# Altium PCB lab2_shkabara_boost.PcbDoc
Units mm, origin at the board's own origin, x right, y up, seen from the top; angles counter-clockwise.
Board outline 60.7 x 40 mm, 2 copper layers (Top Layer, Bottom Layer), stack 1.57 mm thick; 26 components, 13 nets, 74 pads, 197 vias.
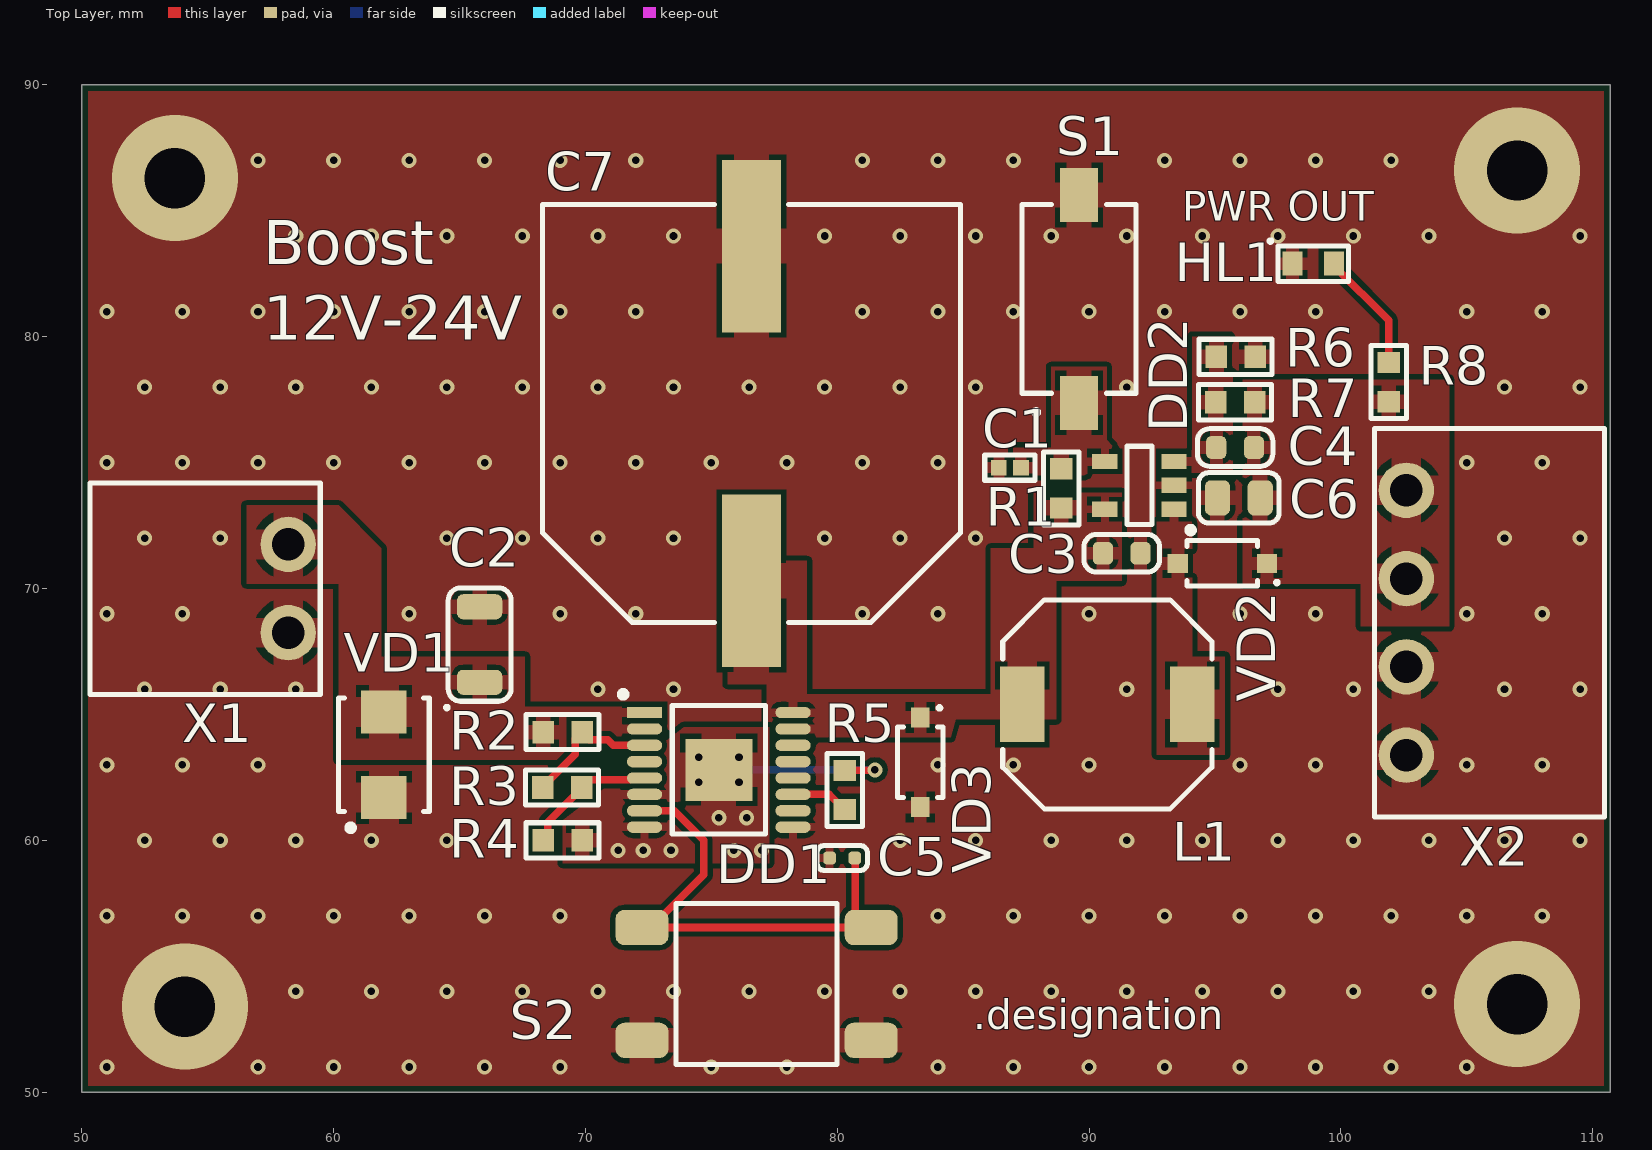
[diagram p0: Top Layer view]
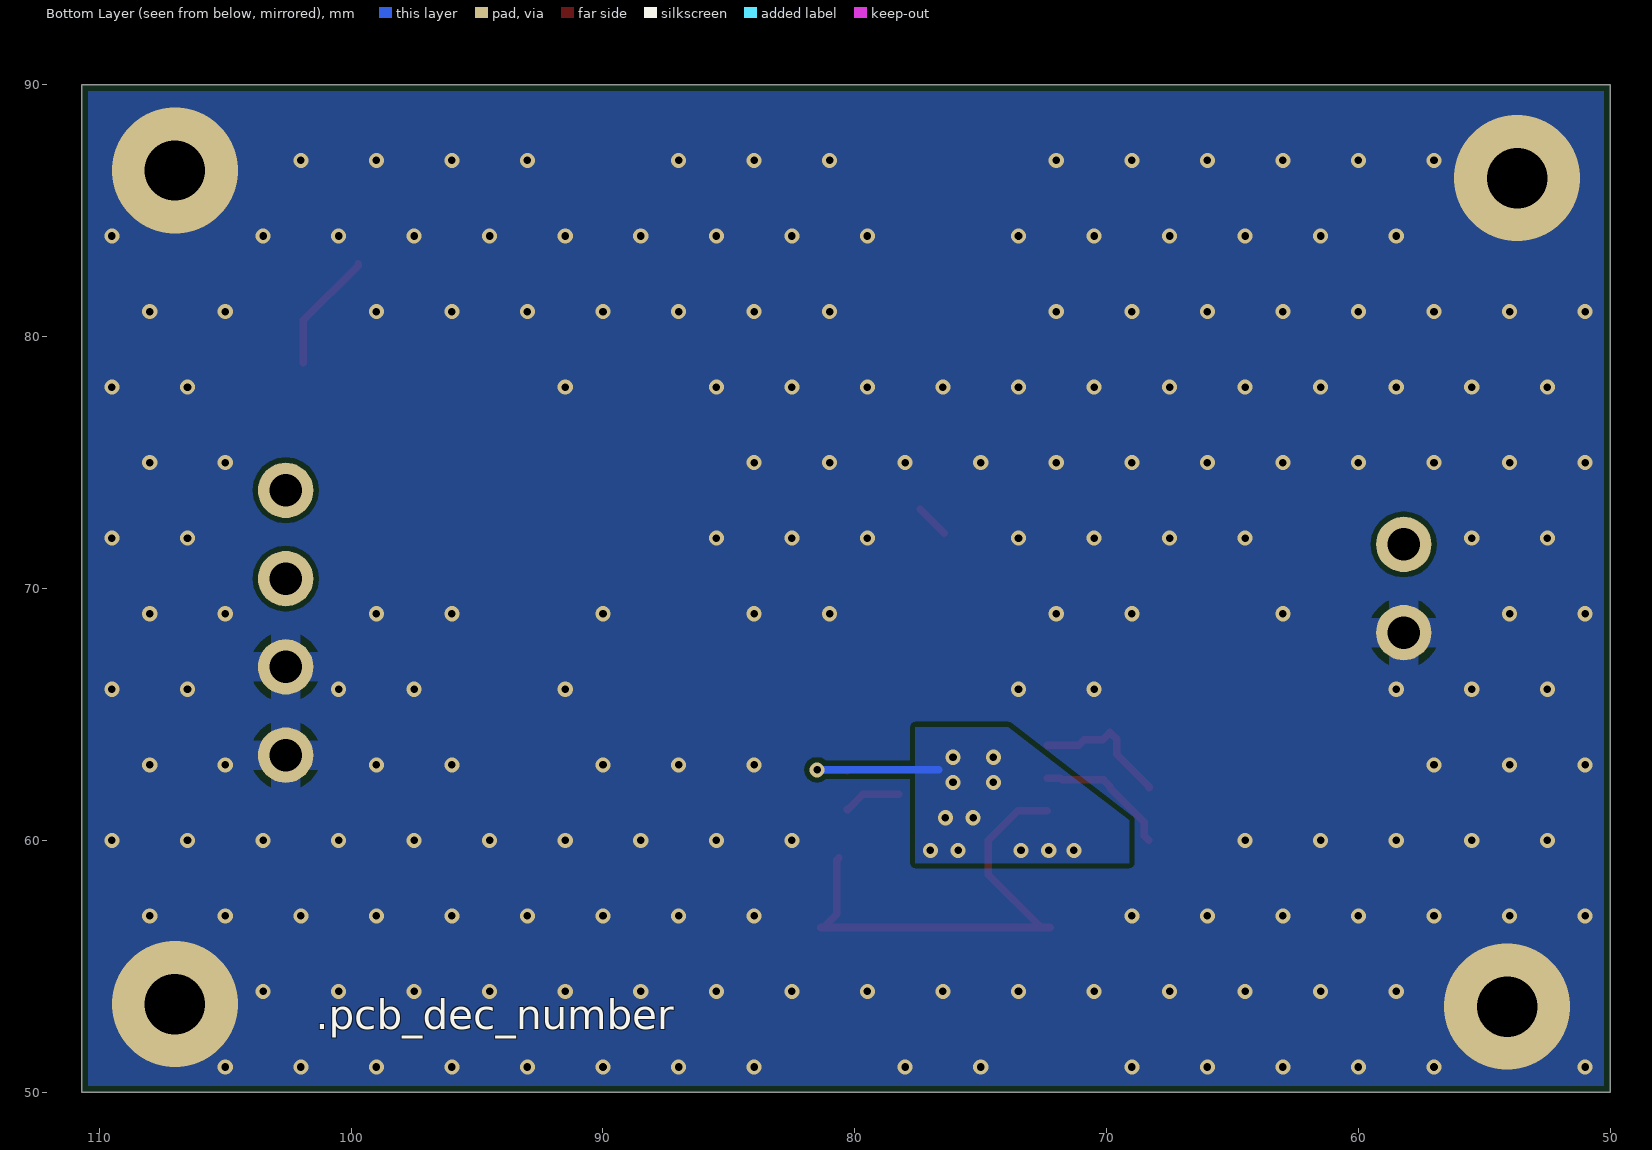
[diagram p1: Bottom Layer view, seen from below]

## Layer stack, top to bottom
Top Solder: solder mask 0.0102, Solder Resist, Dk 3.5
Top Layer: signal copper 0.035
Core 1: core 1.5, FR4, Dk 4.6
Bottom Layer: signal copper 0.035
Bottom Solder: solder mask 0.0102, Solder Resist, Dk 3.5

## Board outline
50,50 110.7,50 110.7,90 50,90

## Design rules (kind name [scope] priority, off if disabled: settings)
AcuteAngle min_acute_angle [OnCopper] p1: minimum=3.50000000000000E+0001 checktracksonly=FALSE // Минимальный угол между примитивами топологии
BoardOutlineClearance board_outline_clearance_std [NOT (OnLayer('Bottom Overlay') OR OnLayer('Top Overlay'))] p1: gap=0.25 ignorepadtopadclearanceinfootprint=FALSE except(0: Arc-SplitContinuation Track-SplitContinuation SMDPad-SplitContinuation THPad-SplitContinuation Via-SplitContinuation Fill-SplitContinuation Poly-SplitContinuation Region-SplitContinuation Text-SplitContinuation) // Отступ элементов топологии от края фрезеруемой печатной платы
Clearance clearance_outer_35um_std [OnTopLayer OR OnBottomLayer] p1: gap=0.2 ignorepadtopadclearanceinfootprint=TRUE except(0.25: Arc-Hole Track-Hole SMDPad-Hole THPad-Hole Via-Hole Fill-Hole Poly-Hole Region-Hole Text-Hole) // Зазоры на внешних слоях
Clearance clearance_inner_35um_std [NOT (OnTopLayer Or OnBottomLayer)] p2: gap=0.2 ignorepadtopadclearanceinfootprint=FALSE except(0.25: Arc-Hole Track-Hole SMDPad-Hole THPad-Hole Via-Hole Fill-Hole Poly-Hole Region-Hole Text-Hole) // Зазоры на внутренних слоях
ComponentClearance [All] p1: gap=0 collisioncheckmode=3 verticalgap=0 showdistances=FALSE
DiffPairsRouting diff_pairs_routing [All] p1: maxlimit=0.127 minlimit=0.127 mostfreqgap=0.127 toplayer_minwidth=0.143 toplayer_maxwidth=0.143 toplayer_prefwidth=0.143 bottomlayer_minwidth=0.143 bottomlayer_maxwidth=0.143 bottomlayer_prefwidth=0.143 impedanceprofiledriven=TRUE impedanceprofileid={FD46899E-B5A2-4EF5-A302-5D2DB6A51F35} maxuncoupledlength=12.7 // Правила трассировки дифференциальных пар
HoleSize min_hole_size_std [IsPad] p1: absolutevalues=TRUE maxlimit=5.9 minlimit=0.6 maxpercent=80.000 minpercent=20.000 // Диаметр межслойного переходного отверстия
HoleSize min_hole_size_via_std [IsVia] p2: absolutevalues=TRUE maxlimit=5.9 minlimit=0.3 maxpercent=80.000 minpercent=20.000 // Минимальный диаметр монтажного отверстия
HoleToHoleClearance hole_to_hole_clearance_std [All] p1: gap=0.2 allowstackedmicrovias=FALSE // Минимальное расстояние между краями двух отверстий
MinimumAnnularRing min_via_ar_std [All] p1: minimumring=0.15 // Поясок площадки переходного отверстия (Annular ring VIA)
MinimumAnnularRing min_pad_ar_std [All] p2: minimumring=0.2 // Поясок монтажной контактной площадки (Annular ring PAD)
MinimumSolderMaskSliver min_solder_mask_bridge_std [All] p1: minsoldermaskwidth=0.15 // Мнимальная ширина масочного мостика
PlaneClearance plane_clearance_35um_std [All] p1: clearance=0.2 // Отступ полигона (для слоя plane) от элементов топологии
PlaneConnect [All] p1: planeconnectstyle=Relief reliefexpansion=0.5 reliefentries=4 reliefconductorwidth=0.2 reliefairgap=0.2
PolygonConnect poly_connect_to_pad<=0.3 [(AsMM(PadXSize_AllLayers)<=0.301) or (AsMM(PadYSize_AllLayers)<=0.301)] p1: thpad.connectstyle=Relief thpad.reliefconductorwidth=0.2 thpad.reliefentries=4 thpad.polygonreliefangle="90 Angle" thpad.airgapwidth=0.2 smdpad.connectstyle=Relief smdpad.reliefconductorwidth=0.2 smdpad.reliefentries=4 smdpad.polygonreliefangle="90 Angle" smdpad.airgapwidth=0.2 via.connectstyle=Direct via.reliefconductorwidth=0.254 via.reliefentries=4 via.polygonreliefangle="90 Angle" via.airgapwidth=0.254 // Правила подключения полигонов для падов от 0,3мм и меньше
PolygonConnect poly_connect_to_pad<=0.4 [(AsMM(PadXSize_AllLayers)<=0.401) or (AsMM(PadYSize_AllLayers)<=0.401)] p2: thpad.connectstyle=Relief thpad.reliefconductorwidth=0.26 thpad.reliefentries=4 thpad.polygonreliefangle="90 Angle" thpad.airgapwidth=0.2 smdpad.connectstyle=Relief smdpad.reliefconductorwidth=0.26 smdpad.reliefentries=4 smdpad.polygonreliefangle="90 Angle" smdpad.airgapwidth=0.2 via.connectstyle=Direct via.reliefconductorwidth=0.254 via.reliefentries=4 via.polygonreliefangle="90 Angle" via.airgapwidth=0.254 // Правила подключения полигонов для падов от 0,4 и меньше
PolygonConnect poly_connect_to_pad<=0.6 [(AsMM(PadXSize_AllLayers)<=0.601) or (AsMM(PadYSize_AllLayers)<=0.601)] p3: thpad.connectstyle=Relief thpad.reliefconductorwidth=0.33 thpad.reliefentries=4 thpad.polygonreliefangle="90 Angle" thpad.airgapwidth=0.2 smdpad.connectstyle=Relief smdpad.reliefconductorwidth=0.33 smdpad.reliefentries=4 smdpad.polygonreliefangle="90 Angle" smdpad.airgapwidth=0.2 via.connectstyle=Direct via.reliefconductorwidth=0.254 via.reliefentries=4 via.polygonreliefangle="90 Angle" via.airgapwidth=0.254 // Правила подключения полигонов для падов от 0,6мм и меньше
PolygonConnect poly_connect_to_pad<=0.7 [(AsMM(PadXSize_AllLayers)<=0.701) or (AsMM(PadYSize_AllLayers)<=0.701)] p4: thpad.connectstyle=Relief thpad.reliefconductorwidth=0.46 thpad.reliefentries=4 thpad.polygonreliefangle="90 Angle" thpad.airgapwidth=0.2 smdpad.connectstyle=Relief smdpad.reliefconductorwidth=0.46 smdpad.reliefentries=4 smdpad.polygonreliefangle="90 Angle" smdpad.airgapwidth=0.2 via.connectstyle=Direct via.reliefconductorwidth=0.254 via.reliefentries=4 via.polygonreliefangle="90 Angle" via.airgapwidth=0.254 // Правила подключения полигонов для падов от 0,7мм и меньше
PolygonConnect poly_connect_to_pad<=0.8 [(AsMM(PadXSize_AllLayers)<=0.8)or(AsMM(PadYSize_AllLayers)<=0.8)] p5: thpad.connectstyle=Relief thpad.reliefconductorwidth=0.53 thpad.reliefentries=4 thpad.polygonreliefangle="90 Angle" thpad.airgapwidth=0.3 smdpad.connectstyle=Relief smdpad.reliefconductorwidth=0.53 smdpad.reliefentries=4 smdpad.polygonreliefangle="90 Angle" smdpad.airgapwidth=0.2 via.connectstyle=Direct via.reliefconductorwidth=0.254 via.reliefentries=4 via.polygonreliefangle="90 Angle" via.airgapwidth=0.254 // Правила подключения полигонов для падов от 0,8мм и меньше
PolygonConnect poly_connect_to_pad<=1 [(AsMM(PadXSize_AllLayers)<=1.01)or(AsMM(PadYSize_AllLayers)<=1.01)] p6: thpad.connectstyle=Relief thpad.reliefconductorwidth=0.6 thpad.reliefentries=4 thpad.polygonreliefangle="90 Angle" thpad.airgapwidth=0.3 smdpad.connectstyle=Relief smdpad.reliefconductorwidth=0.6 smdpad.reliefentries=4 smdpad.polygonreliefangle="90 Angle" smdpad.airgapwidth=0.2 via.connectstyle=Direct via.reliefconductorwidth=0.254 via.reliefentries=4 via.polygonreliefangle="90 Angle" via.airgapwidth=0.254 // Правила подключения полигонов для падов от 1мм и меньше
PolygonConnect poly_connect_to_pad<=1.3 [(AsMM(PadXSize_AllLayers)<=1.31)or(AsMM(PadYSize_AllLayers)<=1.31)] p7: thpad.connectstyle=Relief thpad.reliefconductorwidth=0.66 thpad.reliefentries=4 thpad.polygonreliefangle="90 Angle" thpad.airgapwidth=0.3 smdpad.connectstyle=Relief smdpad.reliefconductorwidth=0.86 smdpad.reliefentries=4 smdpad.polygonreliefangle="90 Angle" smdpad.airgapwidth=0.2 via.connectstyle=Direct via.reliefconductorwidth=0.254 via.reliefentries=4 via.polygonreliefangle="90 Angle" via.airgapwidth=0.254 // Правила подключения полигонов для падов от 1,3мм и меньше
PolygonConnect poly_connect_to_pad<=1.6 [(AsMM(PadXSize_AllLayers)<=1.61)or(AsMM(PadYSize_AllLayers)<=1.61)] p8: thpad.connectstyle=Relief thpad.reliefconductorwidth=0.8 thpad.reliefentries=4 thpad.polygonreliefangle="90 Angle" thpad.airgapwidth=0.3 smdpad.connectstyle=Relief smdpad.reliefconductorwidth=1 smdpad.reliefentries=4 smdpad.polygonreliefangle="90 Angle" smdpad.airgapwidth=0.2 via.connectstyle=Direct via.reliefconductorwidth=0.254 via.reliefentries=4 via.polygonreliefangle="90 Angle" via.airgapwidth=0.254 // Правила подключения полигонов для падов от 1,6мм и меньше
PolygonConnect poly_connect_to_pad<=1.8 [(AsMM(PadXSize_AllLayers)<=1.8)or(AsMM(PadYSize_AllLayers)<=1.8)] p9: thpad.connectstyle=Relief thpad.reliefconductorwidth=1 thpad.reliefentries=4 thpad.polygonreliefangle="90 Angle" thpad.airgapwidth=0.3 smdpad.connectstyle=Relief smdpad.reliefconductorwidth=1.2 smdpad.reliefentries=4 smdpad.polygonreliefangle="90 Angle" smdpad.airgapwidth=0.2 via.connectstyle=Direct via.reliefconductorwidth=0.254 via.reliefentries=4 via.polygonreliefangle="90 Angle" via.airgapwidth=0.254 // Правила подключения полигонов для падов от 1,8мм и меньше
PolygonConnect poly_connect_to_pad<=2 [(AsMM(PadXSize_AllLayers)<=2.01)or(AsMM(PadYSize_AllLayers)<=2.01)] p10: thpad.connectstyle=Relief thpad.reliefconductorwidth=1.1 thpad.reliefentries=4 thpad.polygonreliefangle="90 Angle" thpad.airgapwidth=0.3 smdpad.connectstyle=Relief smdpad.reliefconductorwidth=1.4 smdpad.reliefentries=4 smdpad.polygonreliefangle="90 Angle" smdpad.airgapwidth=0.2 via.connectstyle=Direct via.reliefconductorwidth=0.254 via.reliefentries=4 via.polygonreliefangle="90 Angle" via.airgapwidth=0.254 // Правила подключения полигонов для падов от 2мм и меньше
PolygonConnect poly_connect_to_pad<=2.3 [(AsMM(PadXSize_AllLayers)<=2.31)or(AsMM(PadYSize_AllLayers)<=2.31)] p11: thpad.connectstyle=Relief thpad.reliefconductorwidth=1.2 thpad.reliefentries=4 thpad.polygonreliefangle="90 Angle" thpad.airgapwidth=0.3 smdpad.connectstyle=Relief smdpad.reliefconductorwidth=1.4 smdpad.reliefentries=4 smdpad.polygonreliefangle="90 Angle" smdpad.airgapwidth=0.2 via.connectstyle=Direct via.reliefconductorwidth=0.254 via.reliefentries=4 via.polygonreliefangle="90 Angle" via.airgapwidth=0.254 // Правила подключения полигонов для падов от 2,3мм и меньше
PolygonConnect poly_connect_to_pad<=2.5 [(AsMM(PadXSize_AllLayers)<=2.51)or(AsMM(PadYSize_AllLayers)<=2.51)] p12: thpad.connectstyle=Relief thpad.reliefconductorwidth=1.2 thpad.reliefentries=4 thpad.polygonreliefangle="90 Angle" thpad.airgapwidth=0.3 smdpad.connectstyle=Relief smdpad.reliefconductorwidth=1.4 smdpad.reliefentries=4 smdpad.polygonreliefangle="90 Angle" smdpad.airgapwidth=0.2 via.connectstyle=Direct via.reliefconductorwidth=0.254 via.reliefentries=4 via.polygonreliefangle="90 Angle" via.airgapwidth=0.254 // Правила подключения полигонов для падов от 2,5мм и меньше
PolygonConnect poly_connect_to_pad<=2.7 [(AsMM(PadXSize_AllLayers)<=2.71)or(AsMM(PadYSize_AllLayers)<=2.71)] p13: thpad.connectstyle=Relief thpad.reliefconductorwidth=1.4 thpad.reliefentries=4 thpad.polygonreliefangle="90 Angle" thpad.airgapwidth=0.3 smdpad.connectstyle=Relief smdpad.reliefconductorwidth=1.6 smdpad.reliefentries=4 smdpad.polygonreliefangle="90 Angle" smdpad.airgapwidth=0.2 via.connectstyle=Direct via.reliefconductorwidth=0.254 via.reliefentries=4 via.polygonreliefangle="90 Angle" via.airgapwidth=0.254 // Правила подключения полигонов для падов от 2,7мм и меньше
PolygonConnect poly_connect_to_pad<=3 [(AsMM(PadXSize_AllLayers)<=3.01)or(AsMM(PadYSize_AllLayers)<=3.01)] p14: thpad.connectstyle=Relief thpad.reliefconductorwidth=1.6 thpad.reliefentries=4 thpad.polygonreliefangle="90 Angle" thpad.airgapwidth=0.3 smdpad.connectstyle=Relief smdpad.reliefconductorwidth=1.8 smdpad.reliefentries=4 smdpad.polygonreliefangle="90 Angle" smdpad.airgapwidth=0.2 via.connectstyle=Direct via.reliefconductorwidth=0.254 via.reliefentries=4 via.polygonreliefangle="90 Angle" via.airgapwidth=0.254 // Правила подключения полигонов для падов от 3мм и меньше
PolygonConnect poly_connect_to_pad<=7 [(AsMM(PadXSize_AllLayers)<7.01)or(AsMM(PadYSize_AllLayers)<=7.01)] p15: thpad.connectstyle=Relief thpad.reliefconductorwidth=2 thpad.reliefentries=4 thpad.polygonreliefangle="90 Angle" thpad.airgapwidth=0.4 smdpad.connectstyle=Relief smdpad.reliefconductorwidth=2 smdpad.reliefentries=4 smdpad.polygonreliefangle="90 Angle" smdpad.airgapwidth=0.3 via.connectstyle=Direct via.reliefconductorwidth=0.254 via.reliefentries=4 via.polygonreliefangle="90 Angle" via.airgapwidth=0.254 // Правила подключения полигонов для падов от 7мм и меньше
PolygonConnect poly_connect_to_pad [All] p16: thpad.connectstyle=Relief thpad.reliefconductorwidth=0.25 thpad.reliefentries=4 thpad.polygonreliefangle="90 Angle" thpad.airgapwidth=0.2 smdpad.connectstyle=Relief smdpad.reliefconductorwidth=0.25 smdpad.reliefentries=4 smdpad.polygonreliefangle="90 Angle" smdpad.airgapwidth=0.2 via.connectstyle=Direct via.reliefconductorwidth=0.25 via.reliefentries=4 via.polygonreliefangle="90 Angle" via.airgapwidth=0.2 // Правила подключения полигонов общие
RoutingCorners [All] p1 off: cornerstyle=45-Degree minsetback=2.5 maxsetback=2.5
RoutingVias [All] p1: holewidth=0.3 width=0.6 viastyle="Through Hole" minholewidth=0.3 minwidth=0.6 maxholewidth=5.9 maxwidth=6.4
SilkToSilkClearance silk_to_silk_clearance_std [All] p1 off: silktosilkclearance=0.15 // Отступ текста шелкографии от других примитивов шелкографии
SilkToSolderMaskClearance silk_to_solder_mask_clearance_std [IsPad] p1 off: minsilkscreentomaskgap=0.15 clearancetoexposedcopper=FALSE // Минимальное расстояние между элементами шелкографии и вскрытой медью
SolderMaskExpansion solder_mask_expansion_std [All] p1: expansion=0.05 // Припуск паяльной масски
UnRoutedNet [All] p1: checkbadconnections=TRUE
Width width_35um_std [All] p1: maxlimit=10 minlimit=0.2 preferedwidth=0.2 checkconnectedcopper=TRUE // Ширина проводников (общая)
19 further rules are at their usual default settings.

## Components (designator, comment, footprint, x,y, rotation, side; value= is the part's Value field where it differs from the comment)
C1 "0,1 мк" C0402#1 86.86,74.8 r180 top
C2 "1 мк" C1206POLAR 65.8,67.775 r90 top
C3 "2,2 мк" C0603 91.3,71.4 r0 top
C4 "82" C0603 95.8,75.6 r180 top
C5 "0,1 мк" C0402#2 80.2,59.3 r180 top
C6 "4,7 мк" C0805 95.95,73.6 r180 top
C7 "2200 мк" CAPAE-1600X1600X2100 76.6,76.95 r90 top
DD1 "TPS26600PWPR" HTSSOP-16 75.3,62.8 r0 top
DD2 "LMR64010XMF/NOPB" SOT-23-5 92,74.1 r180 top
HL1 "TLMO1000-GS08" HL0603 98.9,82.9 r0 top
L1 "DEM8045Z-100M" DEM-2-800X800X450 90.725,65.4 r0 top
R1 "56 к" R0603 88.9,73.975 r270 top
R2 "5,36 M" R0603 69.1,64.3 r180 top
R3 "140 к" R0603 69.075,62.1 r180 top
R4 "510 к" R0603 69.1,60 r180 top
R5 "28,7 к" R0603 80.3,62 r270 top
R6 "13 к" R0603 95.825,79.2 r180 top
R7 "240 к" R0603 95.8,77.4 r0 top
R8 "270" R0603 101.9,78.2 r270 top
S1 "SDA01H1SBD" DIP-SWITCH-01-452X930X545 89.6,81.5 r90 top
S2 "FSM4JSMA" FSM4JSMA 76.8,54.3 r0 top
VD1 "8.0SMDJ45CA" DO-214AB 62,63.4 r90 top
VD2 "MBR0530T1G" SOD-123 95.3,71 r180 top
VD3 "MBR0530T1G" SOD-123 83.3,63.1 r270 top
X1 "395021002" 395021002 54.9,70 r90 top
X2 "395021004" 395021004 105.902,68.642 r270 top

## Footprints (in the part's own frame and the unit in brackets; to place one, negate y for a bottom-side part, rotate by r counter-clockwise, add the part's x,y. Pads: shape width x height; smd on the part's side, far side on the other; paste and mask are expansions set on the pad)
395021002 [mil] "2 Position Terminal Block Header, Male Pins, 3.5mm Pitch,4.2x9.2mm Body, 90°, Right Angle, THT"
  round 86.61 hole 51: 1(-69,-130) 2(69,-130)
  silkscreen extent -165,-180 165,180, body extent -166,-180 166,180, height 280
395021004 [mil] "4 Position Terminal Block Header, Male Pins, 3.5mm Pitch,15.44mmx9.2mm Body, 90°, Right Angle, THT"
  round 86.61 hole 51: 1(-207,-130) 2(-69,-130) 3(69,-130) 4(207,-130)
  silkscreen extent -304,-180 304,180, body extent -304,-180 304,180, height 280
C0402#1 [mm] "Chip Capacitor, 2-Leads, Body 1,00x0,50mm, IPC Medium Density"
  rect 0.62x0.62 smd: 1(-0.44,0) 2(0.44,0)
  silkscreen extent -1,-0.5 1,0.5, body extent -0.5,-0.25 0.5,0.25, height 0.5
C0402#2 [mm] "Chip Capacitor, 2-Leads, Body 1,00x0,50mm, IPC Medium Density"
  rrect50% 0.5x0.5 smd: 1(-0.5,0) 2(0.5,0)
  silkscreen extent -1,-0.5 1,0.5, body extent -0.5,-0.25 0.5,0.25, height 0.5
C0603 [mm] "Chip Capacitor, 2-Leads, Body 1,60x0,80mm, IPC Medium Density"
  rrect50% 0.8x0.9 smd: 1(-0.75,0) 2(0.75,0)
  silkscreen extent -1.5,-0.75 1.5,0.75, body extent -0.8,-0.4 0.8,0.4, height 0.8
C0805 [mm] "Chip Capasitor, 2-Leads, Body 2,00x1,25mm, IPC Medium Density"
  rrect50% 1x1.4 smd: 1(-0.85,0) 2(0.85,0)
  silkscreen extent -1.6,-1 1.6,1, body extent -1,-0.62 1,0.63, height 0.6
C1206POLAR [mm] "Chip Capacitor, 2-Leads, Body 3,20x1,60mm, IPC Medium Density"
  rrect50% 1x1.8 smd: 1(-1.5,0) 2(1.5,0)
  silkscreen extent -2.55,-1.25 2.25,1.35, body extent -1.73,-0.8 1.73,0.8, height 1.65
CAPAE-1600X1600X2100 [mm] "Aluminum Electrolytic Capacitor, Body 16,30x16,30x22,00mm, IPC Medium Density"
  rect 6.85x2.35 smd: 1(-6.65,0) 2(6.65,0)
  silkscreen extent -8.3,-8.3 8.3,8.3, body extent -9.3,-8.3 9.3,8.3, height 22
DEM-2-800X800X450 [mm] "Precision Wire Wound Inductor, 2-Leads, Body 8,00x8,00mm, IPC Medium Density"
  rect 1.75x3 smd: 1(-3.375,0) 2(3.375,0)
  silkscreen extent -4.15,-4.15 4.15,4.15, body extent -4,-4 4,4, height 4.5
DIP-SWITCH-01-452X930X545 [mm]
  rect 2.15x1.5 smd: 1(-4.125,0) 2(4.125,0)
  silkscreen extent -4.6,-2.26 3.74,2.26, body extent -4.65,-2.26 4.65,2.26, height 5.44
DO-214AB [mm] "Molded Diode, 2-Leads, Body 6,86x5,91mm, IPC Medium Density"
  rect 1.7x1.8 smd: 1(-1.7,0) 2(1.7,0)
  silkscreen extent -3.02,-1.8 2.25,1.8, body extent -2.7,-1.81 2.7,1.81, height 2.43
FSM4JSMA [mm]
  rrect50% 2.1x1.4 smd: 1(-4.55,2.24) 1(4.55,2.24) 2(-4.55,-2.24) 2(4.55,-2.24)
  silkscreen extent -3.2,-3.2 3.2,3.2, body extent -5,-3 5,3, height 5.13
HL0603 [mm] "Chip Diode, 2-Leads, Body 1,60x0,80mm, IPC Medium Density"
  rect 0.8x0.95 smd: 1(-0.825,0) 2(0.825,0)
  silkscreen extent -1.75,-0.7 1.4,0.95, body extent -0.81,-0.4 0.81,0.4, height 0.6
HTSSOP-16 [mm] "TSOP, 16-Leads, Body 5,00x4,40mm, Pitch 0,65mm, Thermal Pad 2,46x2,66mm, IPC Medium Density"
  rect 2.66x2.46 smd: 0(0,0)
  rect 1.4x0.45 smd: 1(-2.95,2.275)
  oval 1.4x0.45 smd: 2(-2.95,1.625) 3(-2.95,0.975) 4(-2.95,0.325) 5(-2.95,-0.325) 6(-2.95,-0.975) 7(-2.95,-1.625) 8(-2.95,-2.275) 9(2.95,-2.275) 10(2.95,-1.625) 11(2.95,-0.975) 12(2.95,-0.325) 13(2.95,0.325) 14(2.95,0.975) 15(2.95,1.625) 16(2.95,2.275)
  silkscreen extent -3.92,-2.55 1.85,3.12, body extent -3.2,-2.5 3.2,2.5, height 1.2
R0603 [mm] "Chip Resistor, 2-Leads, Body 1,60x0,80mm, IPC Medium Density"
  rect 0.85x0.9 smd: 1(-0.775,0) 2(0.775,0)
  silkscreen extent -1.45,-0.7 1.45,0.7, body extent -0.8,-0.4 0.8,0.4, height 0.45
SOD-123 [mm] "SODFL, 2-Leads, Body 1,60x3,71mm, IPC Medium Density"
  rect 0.8x0.75 smd: 1(-1.775,0) 2(1.775,0)
  silkscreen extent -2.21,-0.9 1.4,0.9, body extent -1.82,-0.77 1.83,0.78, height 1.5
SOT-23-5 [mm] "SOT-23, 5-Leads, Body 2,90x2,80mm, Pitch 0,95mm, IPC Medium Density"
  rect 1x0.6 smd: 1(-1.375,0.95) 2(-1.375,0) 3(-1.375,-0.95) 4(1.375,-0.95) 5(1.375,0.95)
  silkscreen extent -2.16,-1.55 0.5,1.9, body extent -1.4,-1.45 1.4,1.45, height 1.45

## Part data
C1: library part c0021, "=Описание", HelpURL=https://www.yageo.com/upload/media/product/productsearch/datasheet/mlcc/UPY-GPHC_X5R_4V-to-50V_26.pdf, ID=c0021, Корпус=0402, Наименование=CC0402KRX5R8BB104, Напряжение="25 В", Номинал="0,1 мк", Номинальное напряжение="25 В", Описание="Конденсатор чип 0402 0,1 мкФ 25 В ±10 %", Отклонение="±10 %", Производитель="YAGEO Corp.", Рабочие температуры="от –55 °С до +85 °С", ТКЕ=X5R, Фамилия=Паньков
C2: library part c0117, "=Описание", HelpURL=https://www.vishay.com/capacitors/list/product-40002/, ID=c0117, Корпус=1206, Наименование=293D105X9025A2TE3, Напряжение="25 В", Номинал="1 мк", Номинальное напряжение="25 В", Описание="Конденсатор чип 1206 1 мкФ 25 В ±10 % полярный", Отклонение="±10 %", Производитель="Vishay Intertechnology, Inc.", Рабочие температуры="от –55 °С до +125 °С", Температурный коэффициент емкости=-, Фамилия=Ларионов
C3: library part c0061, "=Описание", HelpURL=https://www.yageo.com/upload/media/product/productsearch/datasheet/mlcc/UPY-GPHC_X5R_4V-to-50V_26.pdf, ID=c0061, Корпус=0603, Наименование=CC0603KRX5R7BB225, Напряжение="16 В", Номинал="2,2 мк", Номинальное напряжение="16 В", Описание="Конденсатор чип 0603 2,2 мкФ 16 В ±10 %", Отклонение="±10 %", Производитель="YAGEO Corp.", Рабочие температуры="от –55 °С до +85 °С", ТКЕ=X5R, Фамилия=Паньков
C4: library part c0011, "=Описание", HelpURL=https://www.yageo.com/upload/media/product/productsearch/datasheet/mlcc/UPY-GP_NP0_16V-to-50V_18.pdf, ID=c0011, Корпус=0603, Наименование=CC0603JRNPO7BN820, Напряжение="16 В", Номинал=82, Номинальное напряжение="16 В", Описание="Конденсатор чип 0603 82 пФ 16 В ±5 %", Отклонение="±5 %", Производитель="YAGEO Corp.", Рабочие температуры="от –55 °С до +125 °С", Температурный коэффициент емкости=C0G, Фамилия=Ларионов
C5: library part c0031, "=Описание", HelpURL=https://www.yageo.com/upload/media/product/productsearch/datasheet/mlcc/UPY-GPHC_X5R_4V-to-50V_26.pdf, ID=c0031, Корпус=0402, Наименование=CC0402KRX5R8BB104, Напряжение="25 В", Номинал="0,1 мк", Номинальное напряжение="25 В", Описание="Конденсатор чип 0402 100 нФ 25 В ±10 %", Отклонение="±10 %", Производитель="YAGEO Corp.", Рабочие температуры="от –55 °С до +85 °С", Температурный коэффициент емкости=X5R, Фамилия=Паньков
C6: library part c0083, "=Описание", HelpURL=https://www.yageo.com/upload/media/product/productsearch/datasheet/mlcc/UPY-GPHC_X5R_4V-to-50V_26.pdf, ID=c0083, Корпус=0603, Наименование=CC0805KRX5R9BB475, Напряжение="50 В", Номинал="4,7 мк", Номинальное напряжение="50 В", Описание="Конденсатор чип 0805 4,7 мкФ 50 В ±10 %", Отклонение="±10 %", Производитель="YAGEO Corp.", Рабочие температуры="от –55 °С до +85 °С", Температурный коэффициент емкости=X5R, Фамилия=Паньков
C7: library part c0109, "=Описание", HelpURL=https://www.vishay.com/capacitors/list/product-28403/, ID=c0109, Корпус="CAPAE (16 x 16 x 21)", Наименование=MAL214699607E3, Напряжение="25 В", Номинал="2200 мк", Номинальное напряжение="25 В", Описание="Конденсатор электролитический 2200 мкФ 25 В ±20 %", Отклонение="±20 %", Производитель="Vishay Intertechnology, Inc.", Рабочие температуры="от –55 °С до +125 °С", Температурный коэффициент емкости=-, Фамилия=Шкабара
DD1: library part dd0001, "=Описание", HelpURL=https://www.ti.com/product/TPS2660, ID=dd0001, Корпус=HTSSOP-16, Максимальное напряжение="62 В", Наименование=TPS26600PWPR, Напряжение="от 4,2 В до 60 В", Описание="Защитная микросхема eFuse 60 В и 2 А", Производитель="Texas Instruments", Рабочие температуры="от -40 °С до +125 °С", Ток="от 0,1 А до 2,23 А", Фамилия=Ларионов
DD2: library part dd0008, "=Описание", HelpURL=https://www.ti.com/product/LMR64010, ID=dd0008, Входное напряжение="от 2,7 В до 14 В", Выходное напряжение="от 3 В до 40 В", Коммутируемый ток="от 0 А до 1 А", Корпус=SOT-23-5, Наименование=LMR64010XMF/NOPB, Описание="Повышающий преобразователь напряжения 40 В и 1 А", Производитель="Texas Instruments", Рабочие температуры="от -40 °С до +125 °С", Фамилия=Шкабара, Частота переключения="1,6 МГц"
HL1: library part hl0002, "=Описание", HelpURL=https://www.vishay.com/leds/list/product-83172/, ID=hl0002, Корпус=0603, Наименование=TLMO1000-GS08, Номинальная длина волны="605 нм", Номинальная сила света="7,5 мкд", Номинальное падение напряжения="1,8 В", Номинальный прямой ток="15 мА", Описание="Светодиод чип 0603 светло-оранжевый", Производитель="Vishay Intertechnology, Inc.", Рабочие температуры="от –40 °С до +100 °С", Рассеиваемая мощность="40 мВт", Фамилия=Ларионов, Цвет="Soft orange"
L1: library part l0005, "=Описание", HelpURL=https://www.murata.com/en-us/products/productdetail?partno=DEM8045Z-100M%23, ID=l0005, Индуктивность="10 мкГн", Корпус="8,0 x 8,0 x 4,5", Максимальное активное сопротивление="39,6 мОм", Наименование=DEM8045Z-100M, Номинал="10 мкГн", Номинальное активное сопротивление="33 мОм", Номинальный ток (при нагреве на 20 °С/40 °С)="3,9 А", Описание="Катушка индуктивности 10 мкГн ±20 %", Отклонение="±20 %", Производитель="Murata Manufacturing Co., Ltd.", Рабочее напряжение="не указано", Рабочие температуры="от –40 °С до +125 °С", Резонансная частота="24 МГц", Ток насыщения="4,3 А", Фамилия=Паньков
R1: library part r0085, "=Описание", HelpURL=https://www.yageo.com/upload/media/product/productsearch/datasheet/rchip/PYu-RC_Group_51_RoHS_L_11.pdf, ID=r0085, Корпус=0603, Наименование=RC0603FR-0756KL, Номинал="56 к", Номинальное напряжение="75 В", Номинальный ток="1 А", Описание="Резистор чип 0603 56 кОм ±1 % 0,1 Вт", Отклонение="±1 %", Производитель="YAGEO Corp.", Рабочие температуры="от –55 °С до +155 °С", Фамилия=Паньков
R2: library part r0128, "=Описание", HelpURL=https://www.yageo.com/upload/media/product/productsearch/datasheet/rchip/PYu-RC_Group_51_RoHS_L_11.pdf, ID=r0128, Корпус=0603, Наименование=RC0603FR-075M36L, Номинал="5,36 M", Номинальное напряжение="75 В", Номинальный ток="1 А", Описание="Резистор чип 0603 5,36 МОм ±1 % 0,1 Вт", Отклонение="±1 %", Производитель="YAGEO Corp.", Рабочие температуры="от –55 °С до +155 °С", Фамилия=Шкабара
R3: library part r0099, "=Описание", HelpURL=https://www.yageo.com/upload/media/product/productsearch/datasheet/rchip/PYu-RC_Group_51_RoHS_L_11.pdf, ID=r0099, Корпус=0603, Наименование=RC0603FR-07140KL, Номинал="140 к", Номинальное напряжение="75 В", Номинальный ток="1 А", Описание="Резистор чип 0603 140 кОм ±1 % 0,1 Вт", Отклонение="±1 %", Производитель="YAGEO Corp.", Рабочие температуры="от –55 °С до +155 °С", Фамилия=Шкабара
R4: library part r0116, "=Описание", HelpURL=https://www.yageo.com/upload/media/product/productsearch/datasheet/rchip/PYu-RC_Group_51_RoHS_L_11.pdf, ID=r0116, Корпус=0603, Наименование=RC0603FR-07510KL, Номинал="510 к", Номинальное напряжение="75 В", Номинальный ток="1 А", Описание="Резистор чип 0603 510 кОм ±1 % 0,1 Вт", Отклонение="±1 %", Производитель="YAGEO Corp.", Рабочие температуры="от –55 °С до +155 °С", Фамилия=Паньков
R5: library part r0075, "=Описание", HelpURL=https://www.yageo.com/upload/media/product/productsearch/datasheet/rchip/PYu-RC_Group_51_RoHS_L_11.pdf, ID=r0075, Корпус=0603, Наименование=RC0603FR-0728K7L, Номинал="28,7 к", Номинальное напряжение="75 В", Номинальный ток="1 А", Описание="Резистор чип 0603 28,7 кОм ±1 % 0,1 Вт", Отклонение="±1 %", Производитель="YAGEO Corp.", Рабочие температуры="от –55 °С до +155 °С", Фамилия=Шкабара
R6: library part r0065, "=Описание", HelpURL=https://www.yageo.com/upload/media/product/productsearch/datasheet/rchip/PYu-RC_Group_51_RoHS_L_11.pdf, ID=r0065, Корпус=0603, Наименование=RC0603FR-0713KL, Номинал="13 к", Номинальное напряжение="75 В", Номинальный ток="1 А", Описание="Резистор чип 0603 13 кОм ±1 % 0,1 Вт", Отклонение="±1 %", Производитель="YAGEO Corp.", Рабочие температуры="от –55 °С до +155 °С", Фамилия=Жернаков
R7: library part r0106, "=Описание", HelpURL=https://www.yageo.com/upload/media/product/productsearch/datasheet/rchip/PYu-RC_Group_51_RoHS_L_11.pdf, ID=r0106, Корпус=0603, Наименование=RC0603FR-07240KL, Номинал="240 к", Номинальное напряжение="75 В", Номинальный ток="1 А", Описание="Резистор чип 0603 240 кОм ±1 % 0,1 Вт", Отклонение="±1 %", Производитель="YAGEO Corp.", Рабочие температуры="от –55 °С до +155 °С", Фамилия=Паньков
R8: library part r0017, "=Описание", HelpURL=https://www.yageo.com/upload/media/product/productsearch/datasheet/rchip/PYu-RC_Group_51_RoHS_L_11.pdf, ID=r0017, Корпус=0603, Наименование=RC0603FR-07270RL, Номинал=270, Номинальное напряжение="75 В", Номинальный ток="1 А", Описание="Резистор чип 0603 270 Ом ±1 % 0,1 Вт", Отклонение="±1 %", Производитель="YAGEO Corp.", Рабочие температуры="от –55 °С до +155 °С", Фамилия=Паньков
S1: library part sw0002, "=Описание", HelpURL=https://www.ckswitches.com/products/switches/product-details/DIP/SDA/SDA01H1SBD/, ID=sw0002, Количество контактов=2, Корпус=4,52х9,30х5,45, Наименование=SDA01H1SBD, Описание="2-х позиционный движковый переключатель", Производитель=C&K, Промывка=Разрешена, Рабочие температуры="от –40 °С до +85 °С", Сопротивление контакта="50 мОм", Ток нагрузки="100 мА @ 5 В", Фамилия=Паньков
S2: library part sw0001, "=Описание", HelpURL=https://www.te.com/usa-en/product-4-1437565-1.html, ID=sw0001, Количество контактов=4, Корпус=6,00x6,00x4,98, Наименование=FSM4JSMA, Описание="Тактовая кнопка поверхностного монтажа", Производитель="TE Connectivity", Промывка=Разрешена, Рабочие температуры="от –35 °С до +85 °С", Сопротивление контакта="100 мОм", Ток нагрузки="50 мА @ 24 В", Фамилия=Паньков
VD1: library part vd0005, "=Описание", HelpURL=https://www.littelfuse.com/products/tvs-diodes/surface-mount/8.0smdj.aspx, ID=vd0005, Корпус=DO-214AB, Наименование=8.0SMDJ45CA, Описание="Двунаправленная диодная сборка для подавления помех, 45 В", Производитель="Littelfuse, Inc.", Фамилия=Шкабара
VD2 VD3: library part vd0001, "=Описание", HelpURL=https://www.onsemi.com/products/discretes-drivers/diodes-rectifiers/schottky-diodes-schottky-rectifiers/mbr0530t1g, ID=vd0001, Импульсное обратное напряжение="30 В", Корпус=SOD-123, Макс допустимый средний прямой ток="0,5 А", Наименование=MBR0530T1G, Описание="Диод Шоттки 30 В 0,5 А", Пиковое прямое напряжение="0,43 В", Производитель="ON Semiconductor", Рабочие температуры="от –65 °С до +125 °С", Фамилия=Шкабара
X1: library part x0008, "=Описание", Contact_1=GND, Contact_2=+12V, HelpURL=https://www.molex.com/molex/products/part-detail/terminal_blocks/0395021002, ID=x0008, Наименование=395021002, Описание="Eurostyle terminal block 2 pin 3,5 мм гнездо угловой", Производитель="Molex Incorporated", Фамилия=Шкабара
X2: library part x0009, "=Описание", Contact_1=+24V, Contact_2=+24V, Contact_3=GND, Contact_4=GND, HelpURL=https://www.molex.com/molex/products/part-detail/terminal_blocks/0395021004, ID=x0009, Наименование=395021004, Описание="Eurostyle terminal block 4 pin 3,5 мм гнездо угловой", Производитель="Molex Incorporated", Фамилия=Шкабара

## Via types
v1: diameter 0.6, hole 0.3, Top Layer to Bottom Layer, tented both sides, 186 vias
v2: diameter 0.6, hole 0.3, Top Layer to Bottom Layer, 7 vias
v3: diameter 5, hole 2.4, Top Layer to Bottom Layer, 4 vias

## Nets (pads, with @x,y where several pads share a name; then routed paths per layer and width w, separated by ;. In a path a pad name is that pad's centre, name@x,y a point inside that pad or via, vN(x,y) a via of type N, cw(c..) or ccw(c..) an arc to the next point about the centre after c; other vN are vias at no path point)
12V_IN: C2.1 DD1.1 DD1.2 R2.2 VD1.2 X1.2
24V_OUT: C4.1 C6.1 R7.2 R8.2 VD2.1 X2.1 X2.2
FB: C4.2 DD2.3 R6.2 R7.1
GND: C1.2 C2.2 C3.2 C5.2 C6.2 C7.2 DD1.9 DD2.2 HL1.1 R6.1 S1.2 S2.2 VD1.1 VD3.2 X1.1 X2.3 X2.4
  other v1: 51,51 57,51 60,51 63,51 66,51 69,51 75,51 78,51 84,51 87,51 90,51 93,51 96,51 99,51 102,51 105,51 58.5,54 61.5,54 64.5,54 67.5,54 70.5,54 73.5,54 76.5,54 79.5,54 82.5,54 85.5,54 88.5,54 91.5,54 94.5,54 97.5,54 100.5,54 103.5,54 51,57 54,57 57,57 60,57 63,57 66,57 69,57 84,57 87,57 90,57 93,57 96,57 99,57 102,57 105,57 108,57 52.5,60 55.5,60 58.5,60 61.5,60 64.5,60 82.5,60 85.5,60 88.5,60 91.5,60 94.5,60 97.5,60 100.5,60 103.5,60 106.5,60 109.5,60 51,63 54,63 57,63 84,63 87,63 90,63 96,63 99,63 105,63 108,63 52.5,66 55.5,66 58.5,66 70.5,66 73.5,66 91.5,66 97.5,66 100.5,66 106.5,66 109.5,66 51,69 54,69 63,69 69,69 72,69 81,69 84,69 90,69 96,69 99,69 105,69 108,69 52.5,72 55.5,72 64.5,72 67.5,72 70.5,72 73.5,72 79.5,72 82.5,72 85.5,72 106.5,72 109.5,72 51,75 54,75 57,75 60,75 63,75 66,75 69,75 72,75 75,75 78,75 81,75 84,75 105,75 108,75 52.5,78 55.5,78 58.5,78 61.5,78 64.5,78 67.5,78 70.5,78 73.5,78 76.5,78 79.5,78 82.5,78 85.5,78 91.5,78 106.5,78 109.5,78 51,81 54,81 57,81 60,81 63,81 66,81 69,81 72,81 81,81 84,81 87,81 90,81 93,81 96,81 99,81 105,81 108,81 58.5,84 61.5,84 64.5,84 67.5,84 70.5,84 73.5,84 79.5,84 82.5,84 85.5,84 88.5,84 91.5,84 94.5,84 97.5,84 100.5,84 103.5,84 109.5,84 57,87 60,87 63,87 66,87 69,87 72,87 81,87 84,87 87,87 93,87 96,87 99,87 102,87
  other v3: 54.1,53.4 107,53.5 53.7,86.3 107,86.6
NetC1_1: C1.1 DD2.4 R1.1 S1.1
NetC3_1: C3.1 C7.1 DD1.15 DD1.16 DD2.5 L1.1 R1.2 VD3.1 | length 1.3
  Top Layer w0.3: C7.1@76.45,72.2 C7.1@77.4,73.15
NetC5_1: C5.1 DD1.7 S2.1 | length 19.3
  Top Layer w0.3: S2.1@72.25,56.54 S2.1@72.6,56.54 ; DD1.7 73.525,61.175 74.7,60 74.7,58.64 S2.1@72.6,56.54 ; C5.1@80.64,59.3 80.72,59.22 80.72,57.075 S2.1@81.255,56.54 ; S2.1@81.35,56.54 S2.1@81.255,56.54 ; S2.1@72.6,56.54 S2.1@81.255,56.54
NetDD1_0: DD1.0 DD1.6 DD1.8 R4.1 R5.1 | length 6.1
  Top Layer w0.3: R5.1 80.312,62.787 81.488,62.787 v2(81.5,62.8)
  Bottom Layer w0.3: v2(76.1,63.3) v2@76.161,63.3 ; 76.661,62.8 v2(81.5,62.8)
  other v1: 71.3,59.6 72.3,59.6 73.4,59.6 75.9,59.6 77,59.6
  other v2: 75.3,60.9 76.4,60.9 74.5,62.3 76.1,62.3 74.5,63.3
NetDD1_3: DD1.3 R2.1 R3.2 | length 5.6
  Top Layer w0.3: R3.2 68.3,62.125 69.6,63.425 69.6,64.025 R2.1 69.875,64.275 70.15,64 70.88,64 71.105,63.775 DD1.3
NetDD1_5: DD1.5 R3.1 R4.2 | length 5.4
  Top Layer w0.3: R4.2 68.5,60.175 68.5,60.725 69.85,62.075 R3.1 69.85,62.125 70.125,62.4 71.759,62.4 71.834,62.475 DD1.5
NetDD1_11: DD1.11 R5.2 | length 2.3
  Top Layer w0.3: DD1.11 79.675,61.825 80.275,61.225 R5.2
NetHL1_2: HL1.2 R8.1 | length 4.8
  Top Layer w0.3: HL1.2 99.725,82.825 101.9,80.65 R8.1
SW: DD2.1 L1.2 VD2.2
pads on no net: DD1.4 DD1.10 DD1.12 DD1.13 DD1.14

## Polygon pours and split planes (outlines as drawn)
GND on Bottom Layer "GND_L02_P082" (solid, pour order 82): 50,90 110.7,90 110.7,50 50,50
NetDD1_0 on Bottom Layer "NETDD1_0_L02_P032" (solid, pour order 32): 71.2,62.4 73.913,64.5 77.6,64.5 77.6,59.1 69.1,59.1 69.1,59.2 69.1,59.4 69.1,60.8
no net on Bottom Layer "NONET_L02_P022" (solid, pour order 22): 73.3,71.8
GND on Top Layer "GND_L01_P080" (solid, pour order 80): 50,90 110.7,90 110.7,50 50,50
12V_IN on Top Layer "12V_IN_L01_P078" (solid, pour order 78): 56.548,73.3 60.2,73.3 61.9,71.6 61.9,67.3 67.6,67.3 67.6,65.3 73.2,65.3 73.2,64.1 71,64.1 71,63.2 60.2,63.2 60.2,70.2 56.548,70.2
NetC1_1 on Top Layer "NETC1_1_L01_P074" (solid, pour order 74): 88.5,78.8 90.7,78.8 90.7,75.9 91.3,75.3 91.3,74.5 87,74.5 87,75.6 88.5,75.6
NetC3_1 on Top Layer "NETC3_1_L01_P072" (solid, pour order 72): 75.65,71.1 78.8,71.1 78.8,64.1 77.2,64.1 77.2,66.2 75.65,66.2
NetC3_1 on Top Layer "NETC3_1_L01_P070" (solid, pour order 70): 87.8,73.8 91.3,73.8 91.3,70.3 88.7,70.3 88.7,64.8 84.7,64.8 84.5,64.1 79.1,64.1 78,64.1 78,65.8 86.1,65.8 86.1,71.6 87.8,71.6
24V_OUT on Top Layer "24V_OUT_L01_P064" (solid, pour order 64): 96.1,78.3 104.3,78.3 104.3,68.5 100.8,68.5 100.8,70.2 96.1,70.2
SW on Top Layer "NONET_L01_P-001" (solid, pour order 58): 92.7,73.6 94.1,73.6 94.1,67.3 95.4,67.3 95.4,63.4 92.7,63.4
FB on Top Layer "FB_L01_P056" (solid, pour order 56): 92.7,75.5 92.7,74.6 95.7,74.6 95.7,74.7 95.7,80 94.1,80 94.1,75.5
NetDD1_0 on Top Layer "NETDD1_0_L01_P030" (solid, pour order 30): 71.2,62.4 73.913,64.5 77.3,64.5 77.3,59.1 69.1,59.1 69.1,59.2 69.1,59.4 69.1,60.8
12V_IN on Top Layer "12V_IN_L01_P076" (solid, pour order 76): 56.7,73.3
24V_OUT on Top Layer "24V_OUT_L01_P068" (solid, pour order 68): 86.9,78.6
24V_OUT on Top Layer "24V_OUT_L01_P066" (solid, pour order 66): 86.9,78.7
24V_OUT on Top Layer "24V_OUT_L01_P062" (solid, pour order 62): 100.1,72.7
no net on Top Layer "NONET_L01_P054" (solid, pour order 54): 92.8,75.5

## Other copper
Top Layer:
  pour cut-out: 110.1,91

## Silkscreen, mask and mechanical layers (free items; w line width, h text height)
Top Overlay:
  text "PWR OUT" at 93.7,84.2 h2
  text "Boost / 12V-24V" at 57.2,79.3 h3
  text ".designation" at 85.4,52.1 h2
Bottom Overlay:
  text ".pcb_dec_number" at 101.4,52.1 h2
Board:
  the board outline again, w0.1
Assembly Notes (Mech5):
  text "'.title'" at 50,47.5 h2
  text "'.project'_'.pcb_dec_number'['.Pcb_File_Name_No_Path']" at 50,45 h2